# EAGLE board mainV2 (EAGLE 7.7.0)
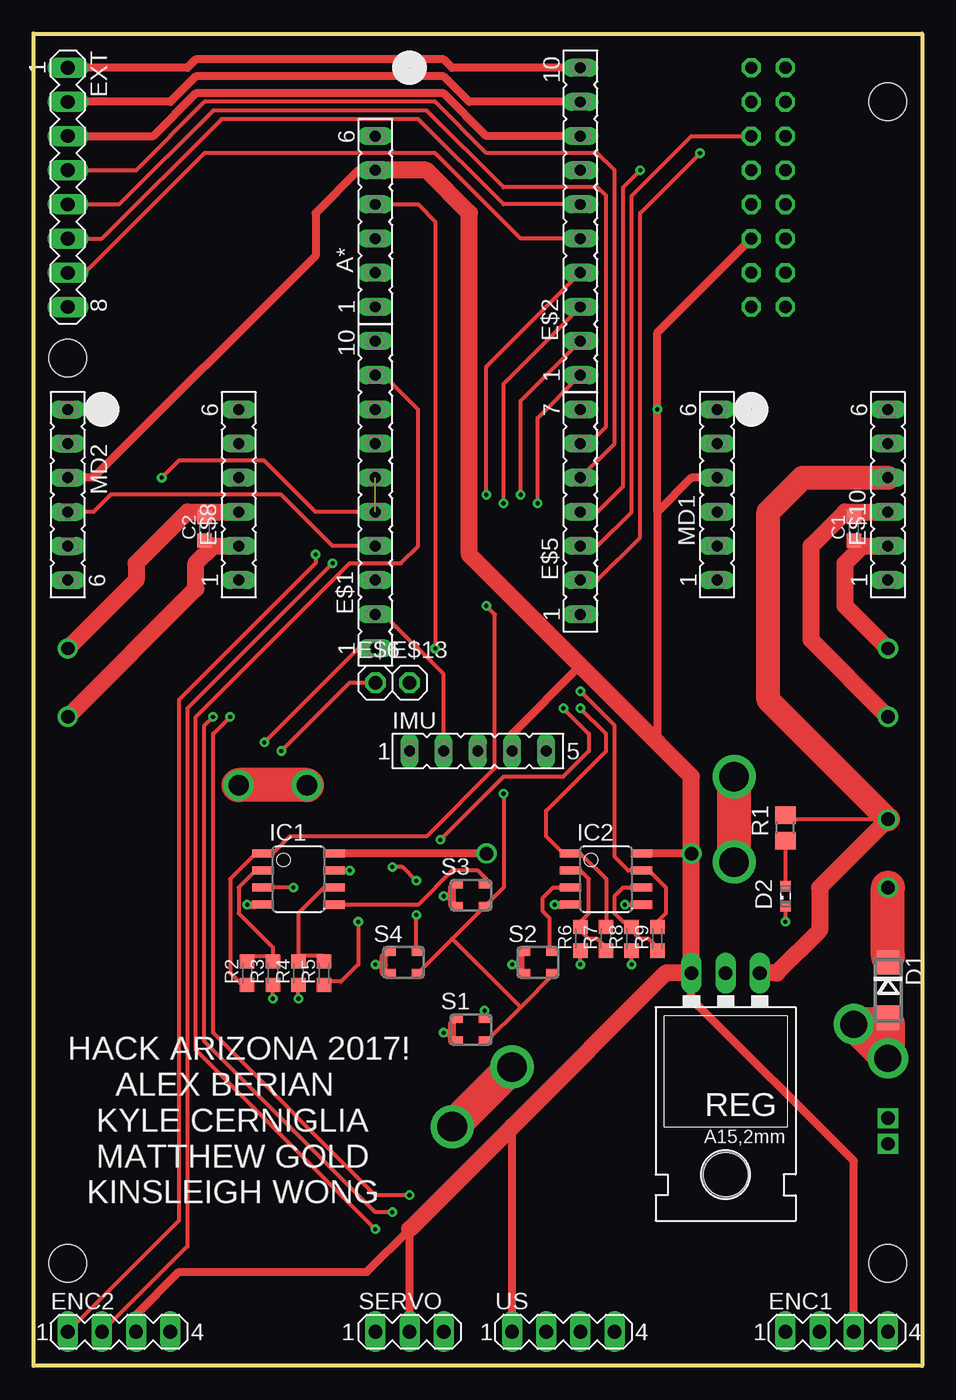
[diagram p0: board, top side]
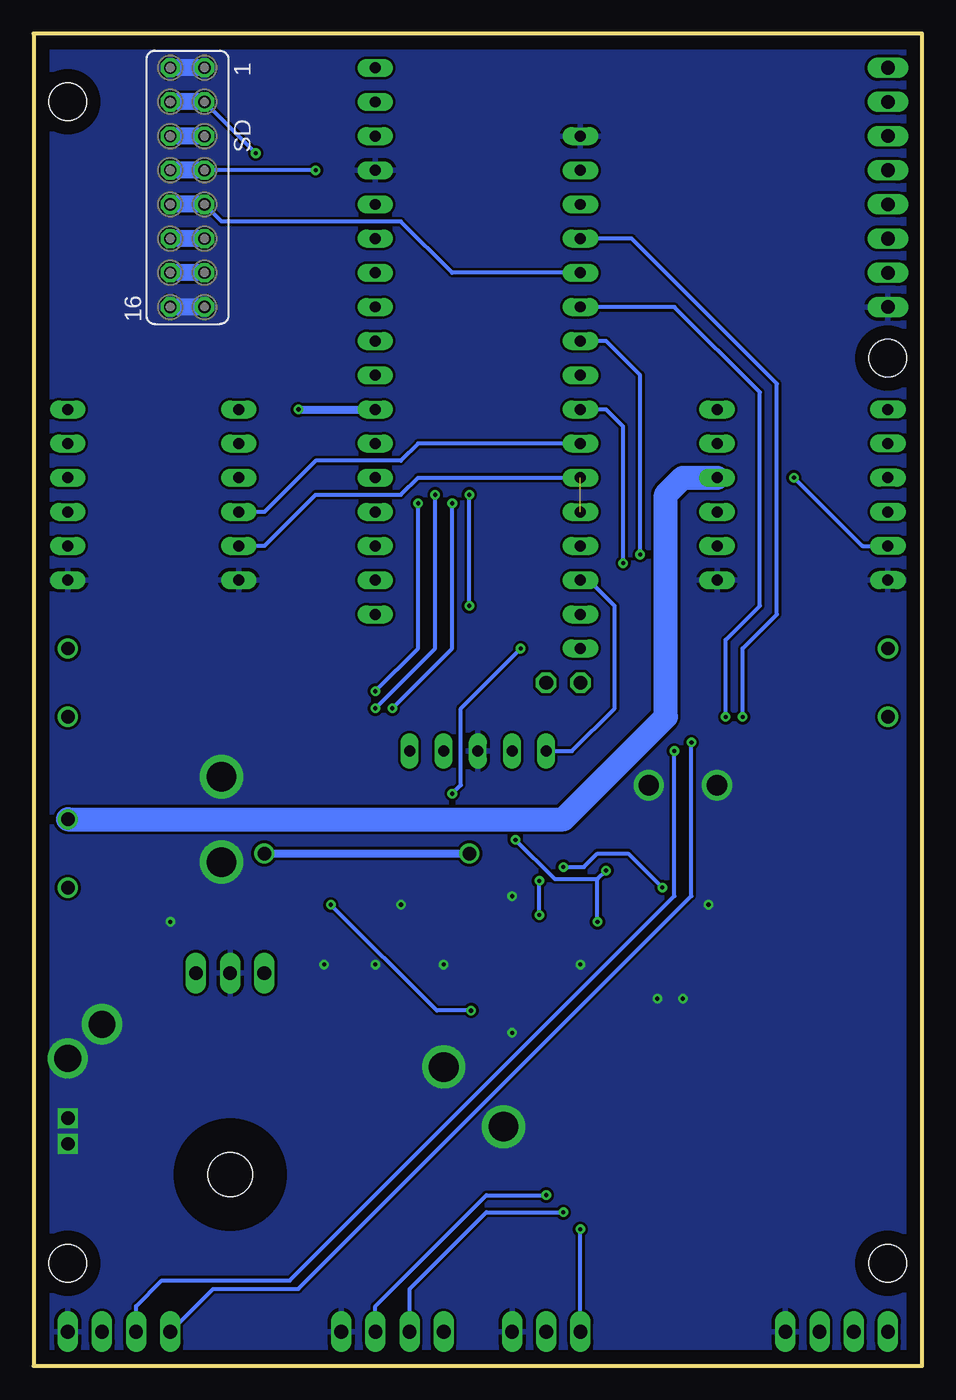
[diagram p1: board, bottom side, seen from below]

Size 66.04 x 99.06 mm. Coordinates in mm from the lower left corner, seen from the top.
Outline: 0,0 0,99.06 66.04,99.06 66.04,0 0,0
Copper layers (1*16): Top 0.035mm / dielectric 1.5mm / Bottom 0.035mm
Design rules "default": minimum track width 10mil, minimum drill 24mil, track to track 8mil, track to pad 8mil, pad to pad 8mil, via to via 8mil, smd to smd 8mil, copper to edge 40mil, drill to drill 8mil, minimum pad ring 10mil, minimum via ring 8mil, stop-mask expansion 4mil, vias tented up to drill 0mil, thermal gap 10mil
Holes 2.8 mm at 63.5,7.62 2.54,7.62 63.5,93.98 2.54,74.93

## Footprints (pad centres in the part's own frame; a part is rotated, then mirrored left to right if it is on the bottom)
FE06 = drill 0.813 long: 1 -6.35,0; 2 -3.81,0; 3 -1.27,0; 4 1.27,0; 5 3.81,0; 6 6.35,0
C0603K = smd 1.05 x 1.08: 1 -0.875,0; 2 0.875,0
DO214AC = smd 1.8 x 1.7: A 2.05,0; C -2.05,0
SML0603 = smd 0.8 x 0.8: A 0.75,0; C -0.75,0
FE10 = drill 0.813 long: 1 -11.43,0; 2 -8.89,0; 3 -6.35,0; 4 -3.81,0; 5 -1.27,0; 6 1.27,0; 7 3.81,0; 8 6.35,0; 9 8.89,0; 10 11.43,0
FE07 = drill 0.813 long: 1 -7.62,0; 2 -5.08,0; 3 -2.54,0; 4 0,0; 5 2.54,0; 6 5.08,0; 7 7.62,0
1X01 = drill 1.016 octagon: 1 0,0
MA04-1 = drill 1.016 long: 1 -3.81,0; 2 -1.27,0; 3 1.27,0; 4 3.81,0
MA08-1 = drill 1.016 long: 1 -8.89,0; 2 -6.35,0; 3 -3.81,0; 4 -1.27,0; 5 1.27,0; 6 3.81,0; 7 6.35,0; 8 8.89,0
8S1 = smd 0.6 x 1.6: 1 -1.905,-2.654; 2 -0.645,-2.654; 3 0.625,-2.654; 4 1.895,-2.654; 5 1.905,2.654; 6 0.635,2.654; 7 -0.635,2.654; 8 -1.905,2.654
FE05-1 = drill 0.813 long: 1 -5.08,0; 2 -2.54,0; 3 0,0; 4 2.54,0; 5 5.08,0
R0805 = smd 1.3 x 1.5: 1 -0.95,0; 2 0.95,0
TO220L1 = drill 1.016 long: 1 -2.54,-3.81; 2 0,-3.81; 3 2.54,-3.81 | hole 3.302: 0,11.176
ASE = smd 0.9 x 0.65: 1 -1.05,-0.825; 2 1.05,-0.825; 3 1.05,0.825; 4 -1.05,0.825
FE08-2 = drill 0.914 octagon: 1 -8.89,1.27; 2 -8.89,-1.27; 3 -6.35,1.27; 4 -6.35,-1.27; 5 -3.81,1.27; 6 -3.81,-1.27; 7 -1.27,1.27; 8 -1.27,-1.27; 9 1.27,1.27; 10 1.27,-1.27; 11 3.81,1.27; 12 3.81,-1.27; 13 6.35,1.27; 14 6.35,-1.27; 15 8.89,1.27; 16 8.89,-1.27
MA03-1 = drill 1.016 long: 1 -2.54,0; 2 0,0; 3 2.54,0

## Placement (x,y rotation side)
A*  [FE06]  25.4,85.09 90 top
C1  [C0603K]  60.96,62.23 90 top
C2  [C0603K]  12.7,62.23 90 top
D1  [DO214AC]  63.5,27.94 270 top
D2  [SML0603]  55.88,34.92 90 top
E$1  [FE10]  25.4,64.77 90 top
E$2  [FE10]  40.64,85.09 90 top
E$5  [FE07]  40.64,63.5 90 top
E$6  [1X01]  25.4,50.8 0 top
E$8  [FE06]  15.24,64.77 90 top
E$10  [FE06]  63.5,64.77 90 top
E$13  [1X01]  27.94,50.8 0 top
ENC1  [MA04-1]  59.69,2.54 0 top
ENC2  [MA04-1]  6.35,2.54 0 top
EXT  [MA08-1]  2.54,87.63 270 top
IC1  [8S1]  19.68,36.2 270 top
IC2  [8S1]  42.55,36.2 270 top
IMU  [FE05-1]  33.02,45.72 0 top
MD1  [FE06]  50.8,64.77 90 top
MD2  [FE06]  2.54,64.77 270 top
R1  [R0805]  55.88,40.01 90 top
R2  [C0603K]  15.88,29.21 90 top
R3  [C0603K]  17.78,29.21 90 top
R4  [C0603K]  19.68,29.21 90 top
R5  [C0603K]  21.59,29.21 90 top
R6  [C0603K]  40.64,31.75 90 top
R7  [C0603K]  42.55,31.75 90 top
R8  [C0603K]  44.45,31.75 90 top
R9  [C0603K]  46.35,31.75 90 top
REG  [TO220L1]  51.44,25.4 180 top
S1  [ASE]  32.5,25 0 top
S2  [ASE]  37.5,30 0 top
S3  [ASE]  32.5,35 0 top
S4  [ASE]  27.5,30 0 top
SD  [FE08-2]  54.61,87.63 270 bottom
SERVO  [MA03-1]  27.94,2.54 0 top
US  [MA04-1]  39.37,2.54 0 top

## Library data of the parts
A* E$1 E$2 E$5 E$8 E$10 IMU MD1 MD2 SD = con-lsta
C1 C2 R2-R9 = ref-packages
D1 = diode
D2 = led
E$6 E$13 = pinhead
ENC1 ENC2 EXT SERVO US = con-lstb
IC1 IC2 = atmel
R1 = eagle-ltspice
REG = v-reg
S1-S4 = crystal

## Nets
3V3: A*.4
EN1A: E$1.1 ENC1.1
EN1B: ENC1.2
EN2A: E$1.10 ENC2.1
EN2B: E$1.8 ENC2.2
GND: A*.6 E$2.7 E$8.1 E$10.1 ENC1.4 ENC2.4 EXT.8 IMU.3 MD1.1 MD2.6 REG.2 SD.1 SD.2 SD.15 SD.16 SERVO.3 US.4
M1: E$2.1
M1A: E$10.2
M1B: E$10.3
M1D: E$1.7 MD1.3
M1S: E$1.5 E$1.6 MD1.2 MD2.5
M2: E$2.2
M2A: E$8.2
M2B: E$8.3
M2D: E$1.4 MD2.4
M3: E$2.3
M4: E$2.4
MISO: E$5.2 SD.3 SD.4
MOSI: E$5.3 SD.5 SD.6
PB0: E$5.5 EXT.4
PD5: E$5.6 EXT.5
PF6: E$2.5 EXT.7
PF7: E$2.6 EXT.6
PNG: A*.3
POW: E$8.4 E$10.4 REG.1
S$1: E$2.9 EXT.2
S$3: E$2.10 EXT.1
S$10: SD.13 SD.14
SCK: E$5.4 SD.7 SD.8
SCL: E$1.3 IMU.1
SDA: E$1.2 IMU.2
SDCS: A*.2 SD.9 SD.10
SERVO: E$1.9 SERVO.1
TRG: A*.1
VCC: A*.5 E$5.7 ENC1.3 ENC2.3 IMU.4 MD1.4 MD2.3 REG.3 SD.11 SD.12 SERVO.2 US.1
VIN: E$2.8 EXT.3

## Tracks (layer width: path | path; a pad name or v marks a point on that pad's centre or on a via)
3V3  (via drill 0.3)
  Top 0.305: A*.4 28.57,86.36 29.84,85.09 v29.84,53.34 | v34.92,42.55 34.92,35.56 31.11,31.75 | 33.66,24.13 36.2,26.67 | 36.2,26.67 38.73,29.21 | 36.2,26.67 31.11,31.75 | 28.57,29.21 31.11,31.75
  Bottom 0.305: v29.84,53.34 34.29,48.9 34.29,43.18 v34.92,42.55
D2
  Top 0.305: 55.88,38.73 55.88,35.56
EN1A  (via drill 0.3)
  Top 0.305: v17.14,46.35 24.13,53.34 E$1.1
  Bottom 0.305: v17.14,46.35 17.14,34.92 46.35,5.71 52.7,5.71 ENC1.1
EN1B  (via drill 0.3)
  Top 0.305: v18.41,45.72 23.5,50.8 25.4,50.8
  Bottom 0.305: ENC1.2 58.42,4.45 56.52,6.35 46.99,6.35 18.41,34.92 v18.41,45.72
EN2A  (via drill 0.3)
  Top 0.305: v20.95,60.33 20.95,59.69 10.79,49.53 10.79,10.79 ENC2.1
  Bottom 0.305: v20.95,60.33 20.95,73.66 23.5,76.2 E$1.10
EN2B  (via drill 0.3)
  Top 0.305: v22.23,59.69 11.43,48.9 11.43,8.89 ENC2.2
  Bottom 0.305: v22.23,59.69 22.23,69.85 23.5,71.12 E$1.8
GND  (via drill 0.3, 1, 1.5, 2, 2.2)
  Top 0.305: 55.88,34.29 v55.88,33.02 | v17.78,27.3 17.78,27.94 | v19.68,27.3 19.68,27.94 | v40.64,29.84 40.64,30.48 | v44.45,29.84 44.45,30.48
  Top 0.61: 31.11,34.29 31.11,34.92 | 31.11,34.92 31.11,35.56 | v30.48,34.92 31.11,34.92 | 26.04,29.21 26.04,29.84 | 26.04,29.84 26.04,30.48 | v25.4,29.84 26.04,29.84 | 31.11,24.13 31.11,24.77 | 31.11,24.77 31.11,25.4 | v30.48,24.77 31.11,24.77 | 36.2,29.21 36.2,29.84 | 36.2,29.84 36.2,30.48 | v35.56,29.84 36.2,29.84 | v15.88,34.29 16.51,34.29 | v38.73,34.29 39.37,34.29
  Top 2.54: v35.56,22.23 v31.11,17.78 | v20.32,43.18 v15.24,43.18 | v52.07,37.47 v52.07,43.81 | 63.5,25.4 v60.96,25.4 v63.5,22.86 63.5,25.4
  Bottom 1.27: SD.1 SD.2 | SD.15 SD.16
  other vias: 63.5,16.51 63.5,18.41
  pour Bottom: 66.04,99.06 0,99.06 0,0 66.04,0
IC1A-
  Top 0.305: 16.51,36.83 15.24,35.56 15.24,33.66 17.78,31.11 17.78,30.48 15.88,30.48
IC1B-
  Top 0.305: 21.59,35.56 19.68,33.66 19.68,30.48 21.59,30.48
IC2A-
  Top 0.305: 40.64,33.02 41.27,33.66 41.27,36.2 40.64,36.83
IC2B-
  Top 0.305: 44.45,35.56 43.81,35.56 43.18,34.92 43.18,33.66 43.81,33.02 44.45,33.02
M1  (via drill 0.3)
  Top 0.305: v40.64,50.16 43.18,47.62 43.18,37.85 44.2,36.83 44.45,36.83 44.7,36.83 45.72,36.83 46.99,35.56 46.99,33.66 46.35,33.02 | v37.47,64.14 37.47,70.48 E$2.1
  Bottom 0.305: v40.64,50.16 37.47,53.34 v37.47,64.14
M1A  (via drill 1)
  Top 1.27: v63.5,53.34 60.33,56.52 60.33,59.69 61.59,60.96 E$10.2
M1B  (via drill 1)
  Top 1.27: v63.5,48.26 57.78,53.98 57.78,60.96 60.33,63.5 E$10.3
M1D
  Bottom 0.305: E$1.7 37.47,68.58 38.73,67.31 45.09,67.31 48.9,63.5 MD1.3
M1S  (via drill 0.3)  (1 unrouted)
  Top 0.305: E$1.5 20.95,63.5 17.14,67.31 10.79,67.31 v9.53,66.04
  Bottom 0.305: MD1.2 48.9,60.96 45.09,64.77 38.73,64.77 37.47,66.04 E$1.6 | v9.53,66.04 4.45,60.96 MD2.5
M2  (via drill 0.3)
  Top 0.305: v40.64,48.9 42.55,46.99 42.55,45.72 38.1,41.27 38.1,39.37 39.37,38.1 40.64,38.1 42.55,36.2 42.55,33.02 | v36.2,64.77 36.2,71.75 E$2.2
  Bottom 0.305: v40.64,48.9 36.2,53.34 v36.2,64.77
M2A  (via drill 1)
  Top 1.27: v2.54,48.26 12.06,57.78 12.06,59.69 13.34,60.96 E$8.2
M2B  (via drill 1)
  Top 1.27: E$8.3 11.43,63.5 7.62,59.69 7.62,58.42 v2.54,53.34
M2D
  Top 0.305: E$1.4 22.23,60.96 18.41,64.77 5.71,64.77 4.45,63.5 MD2.4
M3  (via drill 0.3)
  Top 0.305: v39.37,48.9 41.27,46.99 41.27,45.72 39.37,43.81 34.92,43.81 v30.23,39.12 | v34.92,64.14 34.92,73.03 E$2.3 | v24.13,33.02 24.13,29.84 22.86,28.57 21.59,28.57 | v23.5,36.83 22.86,36.83
  Bottom 0.305: v39.37,48.9 34.92,53.34 v34.92,64.14 | v30.23,39.12 27.3,36.2 24.13,36.2 | v24.13,33.02 24.13,36.2 | 24.13,36.2 v23.5,36.83
M4  (via drill 0.3)
  Top 0.305: v33.66,56.52 34.29,55.88 34.29,44.45 29.21,39.37 19.05,39.37 17.78,38.1 16.51,38.1 14.61,36.2 14.61,29.21 15.88,27.94 | v33.66,64.77 33.66,74.3 E$2.4
  Bottom 0.305: v33.66,56.52 v33.66,64.77
MISO  (via drill 0.3)
  Top 0.305: E$5.2 41.91,58.42 45.09,61.59 45.09,85.72 v49.53,90.17
  Bottom 0.305: v49.53,90.17 SD.3
  Bottom 1.27: SD.3 SD.4
MOSI
  Top 0.305: E$5.3 41.91,60.96 44.45,63.5 44.45,87 48.9,91.44 SD.5
  Bottom 1.27: SD.5 SD.6
PB0
  Top 0.305: E$5.5 43.18,68.58 43.18,88.9 41.91,90.17 33.66,90.17 29.84,93.98 12.7,93.98 7.62,88.9 EXT.4
PD5
  Top 0.305: E$5.6 41.27,68.58 42.55,69.85 42.55,87 41.91,87.63 34.92,87.63 29.21,93.34 13.34,93.34 6.35,86.36 EXT.5
PF6
  Top 0.305: E$2.5 36.2,83.82 29.84,90.17 12.7,90.17 3.81,81.28 EXT.7
PF7
  Top 0.305: E$2.6 34.92,86.36 28.57,92.71 13.97,92.71 5.08,83.82 EXT.6
PNG  (via drill 0.3)
  Top 0.305: v26.67,11.43 25.4,11.43 12.7,24.13 12.7,47.62 v13.34,48.26
  Bottom 0.305: 38.1,2.54 38.1,5.71 32.38,11.43 v26.67,11.43 | v13.34,48.26 13.34,53.34 10.79,55.88 10.79,73.03 21.59,83.82 A*.3
POW  (via drill 1)
  Top 0.305: v63.5,40.64 55.88,40.64
  Top 1.27: v63.5,40.64 58.42,35.56 58.42,32.38 55.24,29.21 REG.1
  Top 1.778: v63.5,40.64 54.61,49.53 54.61,63.5 57.15,66.04 E$10.4
  Bottom 1.778: v63.5,40.64 26.67,40.64 19.05,48.26 19.05,64.77 17.78,66.04 E$8.4
S1O  (via drill 0.3)
  Top 0.305: 33.53,25.91 v33.53,26.42 | v43.94,34.29 44.7,34.29
  Bottom 0.305: v33.53,26.42 36.07,26.42 v43.94,34.29
S2O
  Top 0.305: 38.35,30.99 38.35,33.27 37.85,33.78 37.85,34.8 38.61,35.56 39.37,35.56
S3O
  Top 0.305: 33.66,36.2 33.02,36.83 31.11,36.83 28.57,34.29 22.86,34.29
S4O  (via drill 0.3)
  Top 0.305: 28.45,30.99 v28.45,33.53 | v28.45,36.07 27.43,37.08 v26.67,37.08 | v19.3,35.56 17.53,35.56
  Bottom 0.305: v28.45,33.53 v28.45,36.07 | v26.67,37.08 25.15,37.08 24.13,38.1 21.84,38.1 v19.3,35.56
S$1
  Top 0.61: E$2.9 32.38,93.98 30.48,95.89 12.06,95.89 10.16,93.98 EXT.2
S$2
  Top 0.61: 33.66,38.1 22.86,38.1
S$3
  Top 0.61: E$2.10 31.11,96.52 30.48,97.16 12.06,97.16 11.43,96.52 EXT.1
S$6  (via drill 1)
  Top 2.54: 63.5,30.48 v63.5,35.56
S$10
  Bottom 1.27: SD.13 SD.14
S$11
  Top 0.305: 42.55,31.11 41.91,31.75 41.27,31.75 40.64,32.38
S$17
  Top 0.305: 46.35,31.11 45.72,31.75 45.09,31.75 44.45,32.38
SCK  (via drill 0.3)
  Top 0.305: E$5.4 41.91,63.5 43.81,65.41 43.81,87.63 v45.09,88.9
  Bottom 0.305: v45.09,88.9 SD.7
  Bottom 1.27: SD.7 SD.8
SCL
  Bottom 0.305: IMU.1 26.04,45.72 22.86,48.9 22.86,56.52 24.77,58.42 E$1.3
SDA
  Top 0.305: IMU.2 30.48,51.44 26.04,55.88 E$1.2
SDCS
  Bottom 0.305: A*.2 34.92,81.28 38.73,85.09 52.07,85.09 SD.9
  Bottom 1.27: SD.9 SD.10
SERVO  (via drill 0.3)
  Top 0.305: v25.4,10.16 12.06,23.5 12.06,48.26 23.5,59.69 27.3,59.69 28.57,60.96 28.57,71.12 26.04,73.66 E$1.9
  Bottom 0.305: SERVO.1 v25.4,10.16
TRG  (via drill 0.3)
  Top 0.305: v27.94,12.7 25.4,12.7 13.34,24.77 13.34,46.99 v14.61,48.26
  Bottom 0.305: 40.64,2.54 40.64,4.45 32.38,12.7 v27.94,12.7 | v14.61,48.26 14.61,53.98 12.06,56.52 12.06,72.39 18.41,78.74 A*.1
VCC  (via drill 0.3, 1)
  Top 0.61: MD1.4 48.9,66.04 46.35,63.5 | 46.35,63.5 46.35,46.35 | 46.35,63.5 v46.35,71.12 46.35,76.83 SD.11 | IMU.4 35.56,46.99 40.64,52.07 | A*.5 24.13,88.9 20.95,85.72 20.95,82.55 4.45,66.04 MD2.3 | ENC1.3 60.96,15.24 48.9,27.3 REG.3 | v48.9,38.1 45.72,38.1 | SERVO.2 27.94,10.16 24.77,6.99 10.79,6.99 7.62,3.81 ENC2.3 | US.1 35.56,17.78
  Top 1.27: A*.5 29.21,88.9 32.38,85.72 32.38,60.33 40.64,52.07 46.35,46.35 48.9,43.81 v48.9,38.1 REG.3 46.99,29.21 35.56,17.78 27.94,10.16
  Bottom 0.61: v46.35,71.12 E$5.7 | v48.9,38.1 v33.66,38.1
  Bottom 1.27: SD.11 SD.12
VIN
  Top 0.61: E$2.8 33.66,91.44 30.48,94.61 12.06,94.61 8.89,91.44 EXT.3

## Text on the board
tPlace: HACK ARIZONA 2017! / ALEX BERIAN / KYLE CERNIGLIA / MATTHEW GOLD / KINSLEIGH WONG